# Altium PCB CW.PcbDoc (part 1 of 2)
Units mm, origin at the board's own origin, x right, y up, seen from the top; angles counter-clockwise.
Board outline 140 x 90 mm, 2 copper layers (Top Layer, Bottom Layer), stack 1.671 mm thick; 47 components, 38 nets, 137 pads, 5 vias.
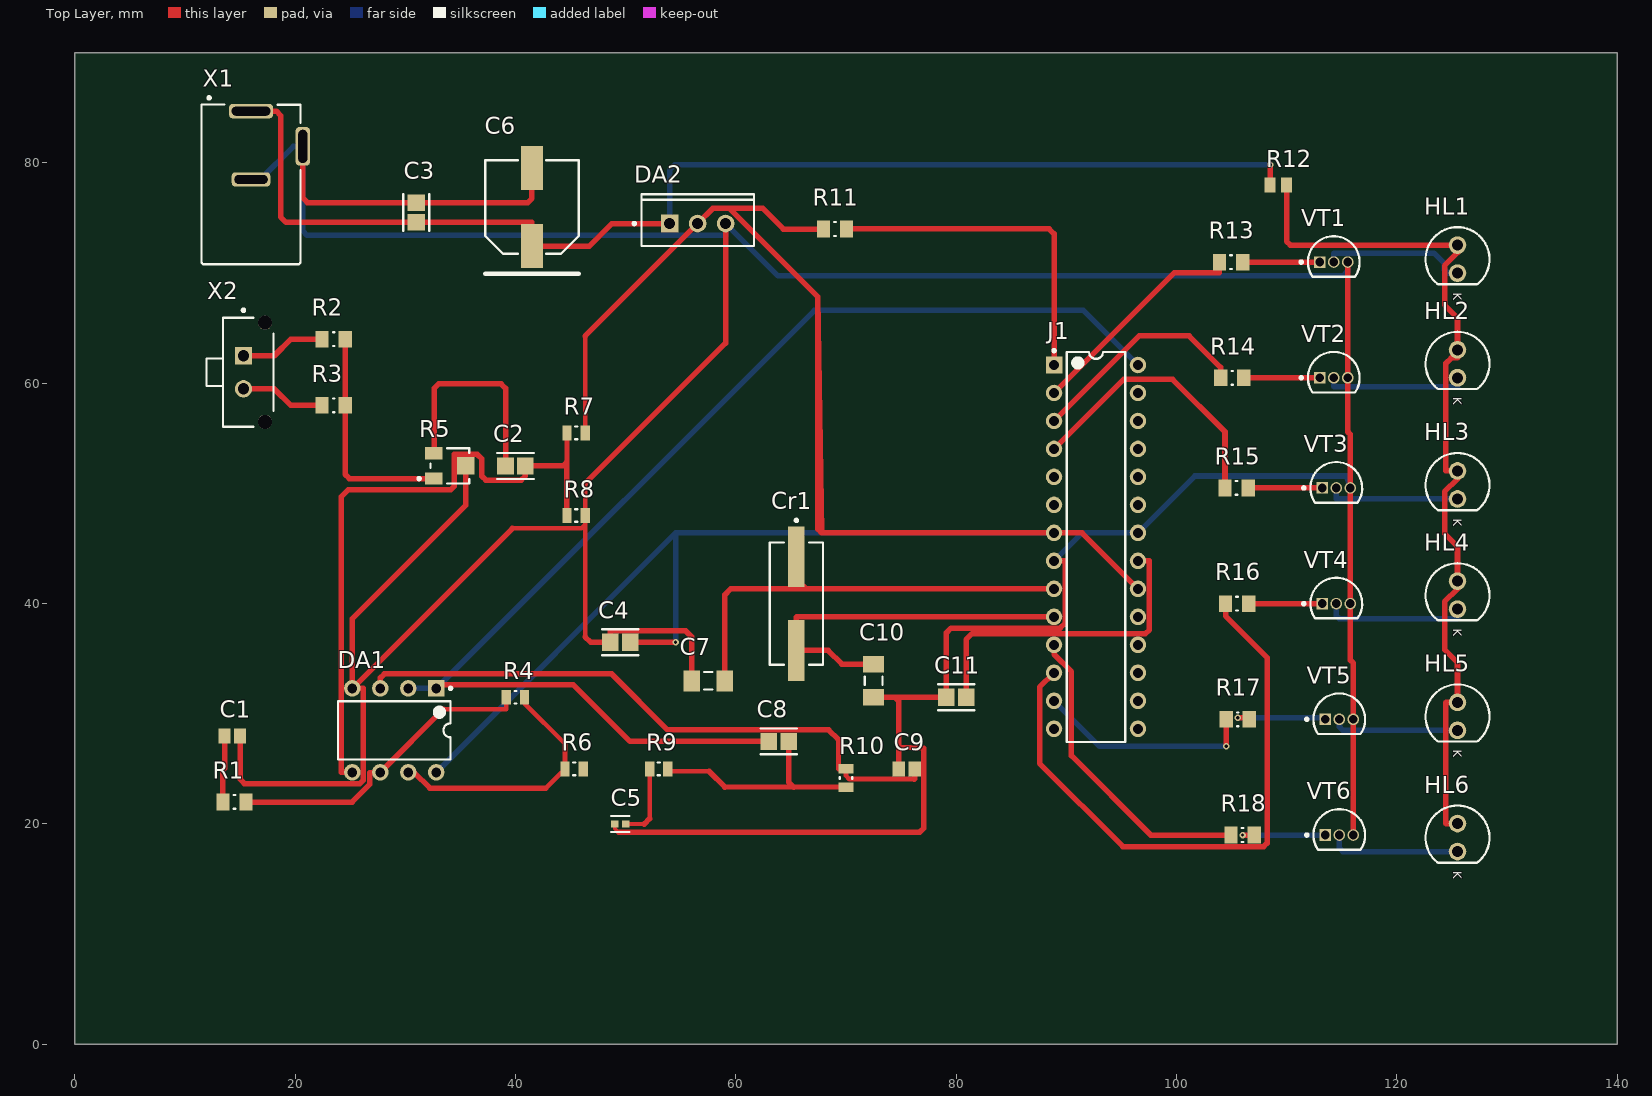
[diagram p0: Top Layer view]
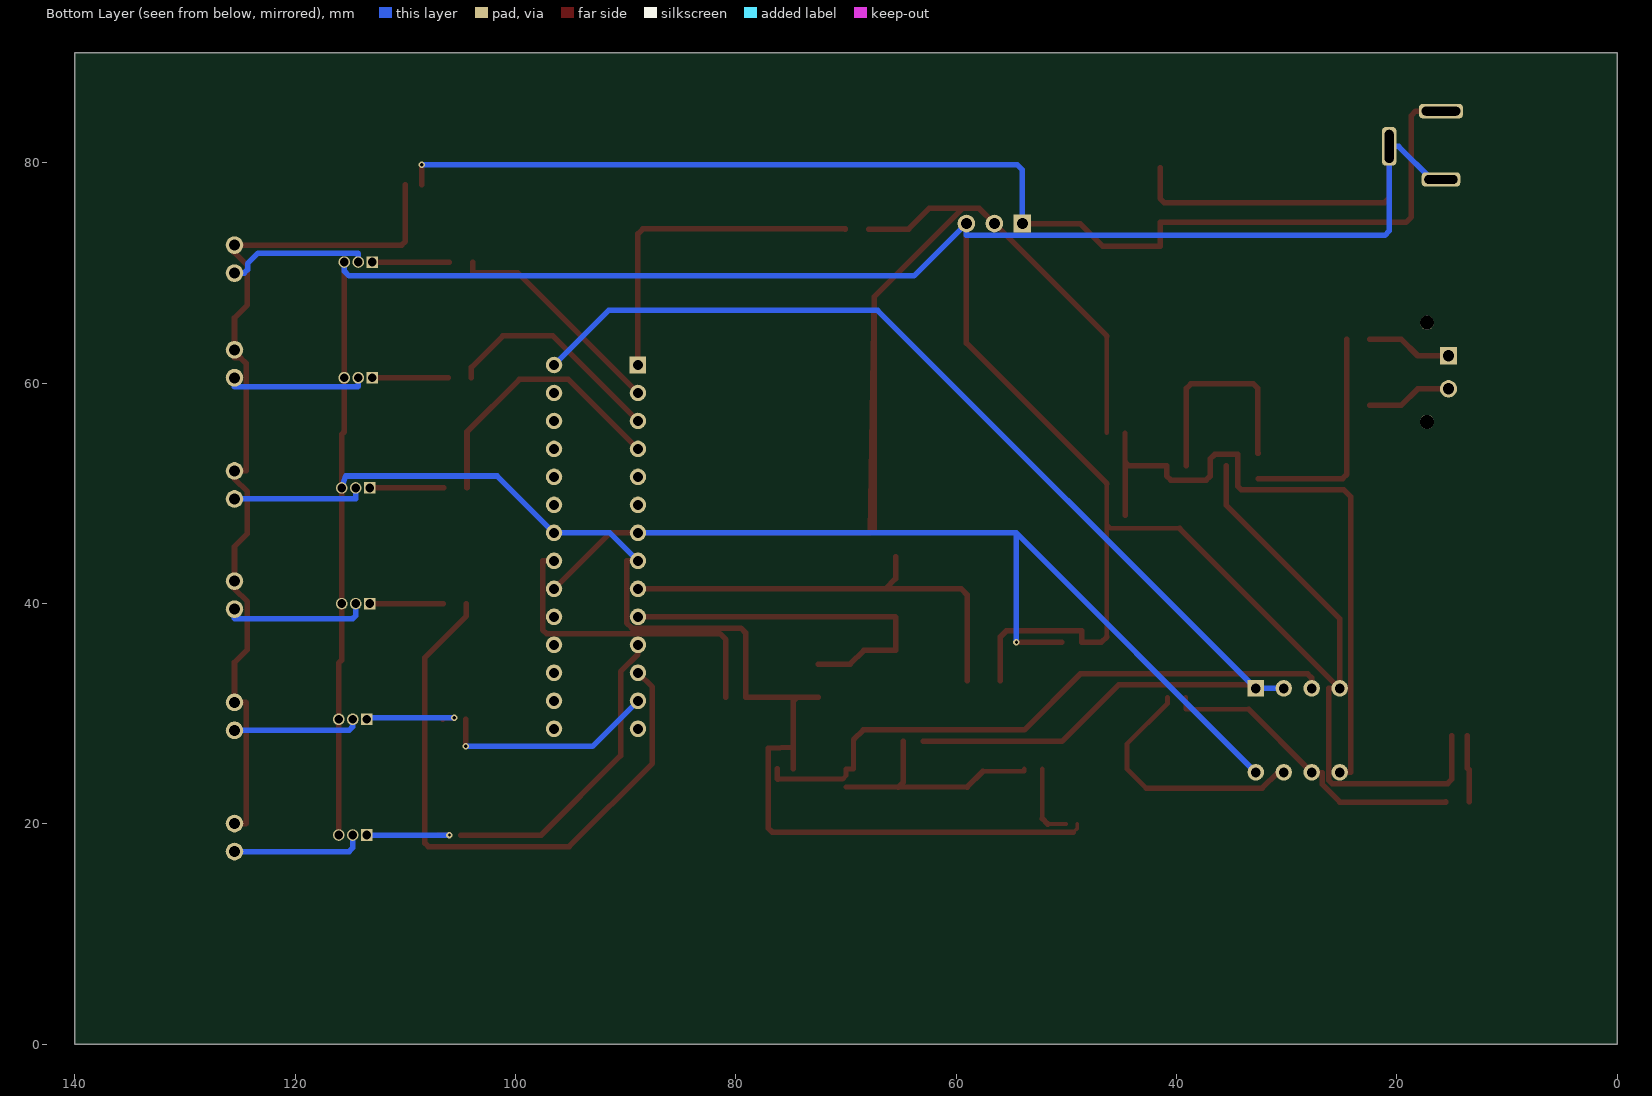
[diagram p1: Bottom Layer view, seen from below]
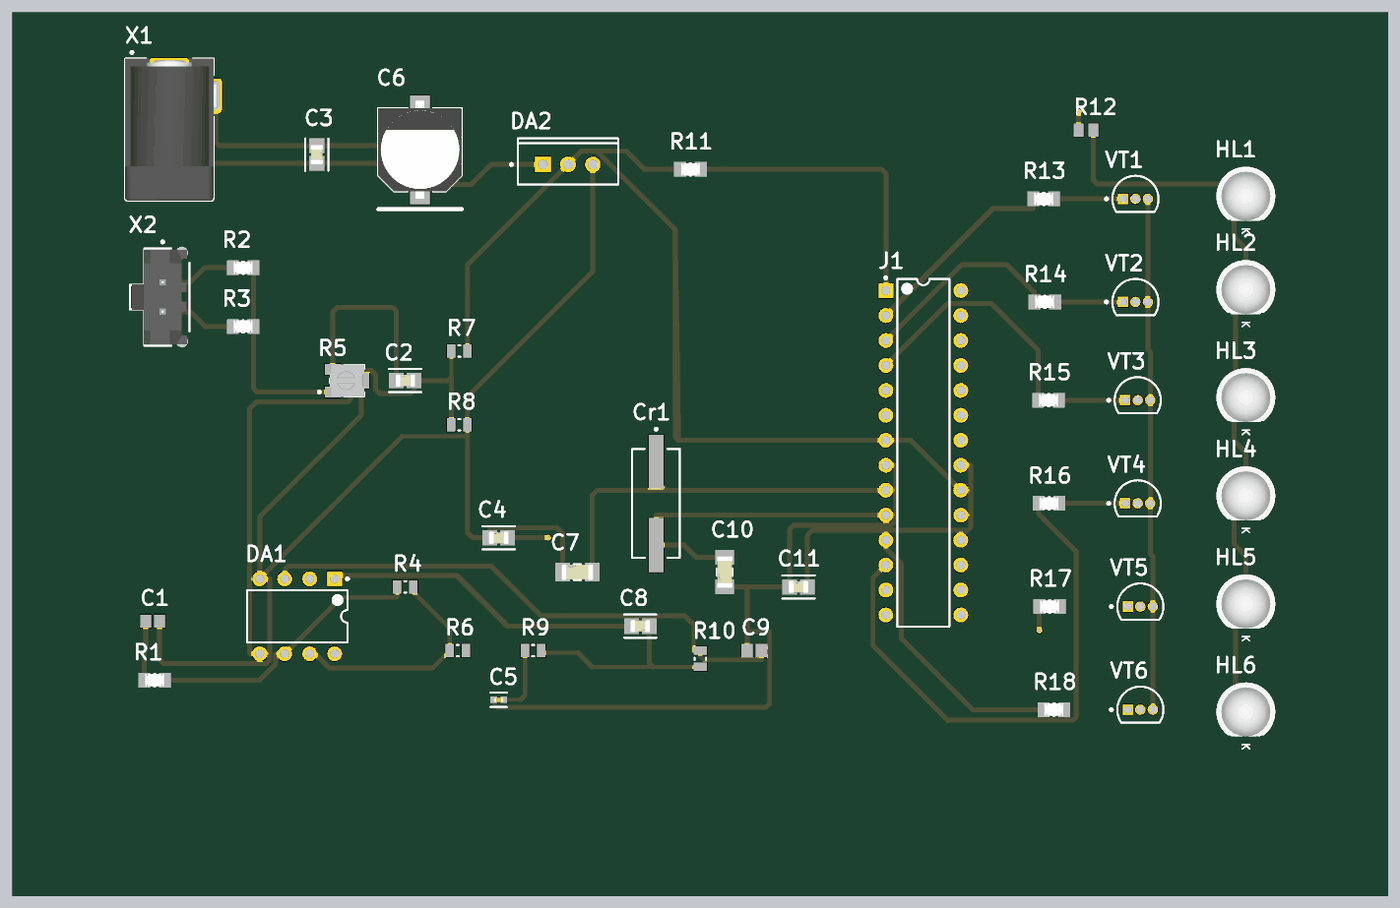
[diagram p2: 3D render of the assembled board from above, using the file's embedded part models]

## Layer stack, top to bottom
Top Solder: solder mask 0.0102, Solder Resist, Dk 3.5
Top Layer: signal copper 0.0356
Dielectric 1: dielectric 1.6, FR-4, Dk 4.8
Bottom Layer: signal copper 0.0356
Bottom Solder: solder mask 0.0102, Solder Resist, Dk 3.5

## Board outline
0,90 140,90 140,0 0,0

## Design rules (kind name [scope] priority, off if disabled: settings)
Clearance [All] p1: gap=0 ignorepadtopadclearanceinfootprint=FALSE
PolygonConnect [All] p1: connectstyle=Relief reliefconductorwidth=0.254 reliefentries=4 polygonreliefangle="90 Angle" airgapwidth=0.254
RoutingVias [All] p1: holewidth=0.3 width=0.6 viastyle="Through Hole" minholewidth=0.3 minwidth=0.6 maxholewidth=0.3 maxwidth=0.6
SMDNeckDown [All] p1: percent=50.000
SolderMaskExpansion [All] p1: expansion=0.102 istentingtop=FALSE
Width [All] p1: maxlimit=1 minlimit=0.3 preferedwidth=0.5
30 further rules are at their usual default settings.

## Components (designator, comment, footprint, x,y, rotation, side; value= is the part's Value field where it differs from the comment)
C1 "470nC" C470nF 14.3,28 r180 top
C2 "100nC" C100nF 40,52.5 r0 top
C3 "100nC" C100nF 31,75.5 r270 top
C4 "100nC" C100nF 49.5,36.5 r0 top
C5 "10nC" C10nF 49.502,20 r0 top
C6 "470uF" ELECTROLYTICCAP 41.5,76 r90 top
C7 "22pC" C22pF 57.5,33 r0 top
C8 "27nC" C27nF 63.901,27.5 r180 top
C9 "1.5nC" C1.5nF 75.5,25 r0 top
C10 "22pC" C22pF 72.5,33.001 r90 top
C11 "100nC" C100nF 80,31.5 r0 top
Cr1 "16MHz" Crystal 65.5,40 r270 top
DA1 "Amplifier (part B)" LM358 29,28.5 r270 top
DA2 "5V" LM7805 56.54,74.5 r90 top
HL1 "red led" LEDred 125.5,71.27 r270 top
HL2 "blue led" LEDblue 125.5,61.77 r270 top
HL3 "red led" LEDred 125.5,50.77 r270 top
HL4 "green led" LEDgreen 125.5,40.77 r270 top
HL5 "yellow led" LEDyellow 125.5,29.77 r270 top
HL6 "green led" LEDgreen 125.5,18.77 r270 top
J1 "1x2 Header" ATmega8 92.69,45.15 r0 top
R1 "10kR" R10kOhm 14.5,22 r0 top
R2 "1kR" R1kOhm 23.5,64 r0 top
R3 "1kR" R1kOhm 23.5,58 r0 top
R4 "100kR" R100kOhm 40,31.5 r0 top
R5 "10kR" Potentiometer 34.05,52.5 r0 top
R6 "2.4kR" R2.4kohm 45.325,25 r0 top
R7 "220kR" R220kOhm 45.5,55.5 r0 top
R8 "220kR" R220kOhm 45.5,48 r180 top
R9 "2.4kR" R2.4kohm 53,25 r0 top
R10 "2.4kR" R2.4kohm 70,24.175 r90 top
R11 "10kR" R10kOhm 69,74 r180 top
R12 "100R" R100Ohm 109.25,78 r0 top
R13 "1kR" R1kOhm 104.949,71 r0 top
R14 "1kR" R1kOhm 105.051,60.5 r0 top
R15 "1kR" R1kOhm 105.449,50.5 r0 top
R16 "1kR" R1kOhm 105.5,40 r0 top
R17 "1kR" R1kOhm 105.551,29.5 r0 top
R18 "1kR" R1kOhm 106,19 r0 top
VT1 "BC639" BC639 114.27,71 r0 top
VT2 "BC639" BC639 114.27,60.5 r0 top
VT3 "BC639" BC639 114.5,50.5 r0 top
VT4 "BC639" BC639 114.5,40 r0 top
VT5 "BC639" BC639 114.77,29.5 r0 top
VT6 "BC639" BC639 114.77,19 r0 top
X1 "+12V" PG_Connector 16,78.5 r270 top
X2 "ConnectorAudio" AudioConnector 15,61 r90 top

## Footprints (in the part's own frame and the unit in brackets; to place one, negate y for a bottom-side part, rotate by r counter-clockwise, add the part's x,y. Pads: shape width x height; smd on the part's side, far side on the other; paste and mask are expansions set on the pad)
ATmega8 [mm]
  rect 1.5x1.5 hole 0.9: 1(-3.81,16.51)
  round 1.5 hole 0.9: 2(-3.81,13.97) 3(-3.81,11.43) 4(-3.81,8.89) 5(-3.81,6.35) 6(-3.81,3.81) 7(-3.81,1.27) 8(-3.81,-1.27) 9(-3.81,-3.81) 10(-3.81,-6.35) 11(-3.81,-8.89) 12(-3.81,-11.43) 13(-3.81,-13.97) 14(-3.81,-16.51) 15(3.81,-16.51) 16(3.81,-13.97) 17(3.81,-11.43) 18(3.81,-8.89) 19(3.81,-6.35) 20(3.81,-3.81) 21(3.81,-1.27) 22(3.81,1.27) 23(3.81,3.81) 24(3.81,6.35) 25(3.81,8.89) 26(3.81,11.43) 27(3.81,13.97) 28(3.81,16.51)
  silkscreen extent -3.93,-17.7 2.65,17.93, body extent -3.6,-17.65 3.6,17.65, height 4.58
AudioConnector [mm]
  rect 1.57x1.57 hole 1.02 paste-1000 mask+0: 1(1.5,-0.315)
  round 1.57 hole 1.02 paste-1000 mask+0: 2(-1.5,-0.315)
  round 1.27 hole 1.27 unplated paste-1000 mask+0: ""(-4.5,-2.275) ""(4.5,-2.275)
  silkscreen extent -4.95,-3.04 5.75,3.03, body extent -5.24,-3.14 5.24,3.14, height 0.25
BC639 [mm]
  rect 1.05x1.05 hole 0.8: 1(-1.27,0)
  round 1.05 hole 0.8: 2(0,0) 3(1.27,0)
  silkscreen extent -3.07,-1.34 2.35,2.35, body extent -2.35,-1.33 2.36,2.36, height 7.87
C1.5nF [mm]
  rect 1.15x1.35 smd: 1(-0.725,0) 2(0.725,0)
  body extent -1.1,-0.72 1.1,0.72, height 0.94
C10nF [mm]
  rect 0.668x0.672 smd paste+0 mask+0: 1(-0.502,0) 2(0.502,0)
  silkscreen extent -0.84,-0.74 0.84,0.74, body extent -1.04,-0.54 1.04,0.54, height 0.25
C22pF [mm]
  rect 1.505x1.906 smd paste+0 mask+0: 1(-1.501,0) 2(1.501,0)
  silkscreen extent -0.37,-0.8 0.37,0.8, body extent -2.75,-1.45 2.75,1.45, height 0.25
C27nF [mm]
  rect 1.505x1.556 smd paste+0 mask+0: 1(-0.901,0) 2(0.901,0)
  silkscreen extent -1.65,-1.18 1.65,1.18, body extent -2.15,-1.28 2.15,1.28, height 0.25
C100nF [mm]
  rect 1.505x1.556 smd paste+0 mask+0: 1(-0.901,0) 2(0.901,0)
  silkscreen extent -1.65,-1.18 1.65,1.18, body extent -2.15,-1.28 2.15,1.28, height 0.25
C470nF [mm]
  rect 1.1x1.35 smd: 1(-0.7,0) 2(0.7,0)
  body extent -1.1,-0.72 1.1,0.72, height 1.4
Crystal [mm]
  rect 5.5x1.5 smd: 1(-4.25,0) 2(4.25,0)
  silkscreen extent -7.67,-2.41 5.55,2.42, body extent -5.59,-2.42 5.59,2.42, height 4.3
ELECTROLYTICCAP [mm]
  rect 4x2 smd: +(-3.55,0) -(3.55,0)
  silkscreen extent -6.05,-4.25 4.25,4.25, body extent -5,-4.25 5,4.25, height 10.5
LEDblue [mm]
  round 1.6 hole 1: 1(1.27,0) 2(-1.27,0)
  silkscreen extent -2.9,-2.9 2.29,2.9, body extent -2.9,-2.9 2.5,2.9, height 11.7
LEDgreen [mm]
  round 1.6 hole 1: 1(1.27,0) 2(-1.27,0)
  silkscreen extent -2.9,-2.9 2.29,2.9, body extent -2.9,-2.9 2.5,2.9, height 11.7
LEDred [mm]
  round 1.6 hole 1: 1(1.27,0) 2(-1.27,0)
  silkscreen extent -2.9,-2.9 2.29,2.9, body extent -2.9,-2.9 2.5,2.9, height 11.7
LEDyellow [mm]
  round 1.6 hole 1: 1(1.27,0) 2(-1.27,0)
  silkscreen extent -2.9,-2.9 2.29,2.9, body extent -2.9,-2.9 2.5,2.9, height 11.7
LM358 [mm]
  rect 1.5x1.5 hole 0.9: 1(-3.81,3.81)
  round 1.5 hole 0.9: 2(-3.81,1.27) 3(-3.81,-1.27) 4(-3.81,-3.81) 5(3.81,-3.81) 6(3.81,-1.27) 7(3.81,1.27) 8(3.81,3.81)
  silkscreen extent -3.93,-5.1 2.65,5.24, body extent -3.95,-5.07 3.95,5.07, height 5.08
LM7805 [mm]
  rect 1.6x1.6 hole 1: 1(0,2.54)
  round 1.6 hole 1: 2(0,0) 3(0,-2.54)
  silkscreen extent -2.04,-5.1 2.66,5.87, body extent -2.04,-5.1 2.66,5.1, height 18.95
PG_Connector [mm]
  rrect50% 1.3x4 hole 0.8 slot 3.5 at 90 deg: 1(-6.2,0)
  rrect50% 1.3x3.5 hole 0.8 slot 3 at 90 deg: 2(0,0)
  rrect50% 3.5x1.3 hole 0.8 slot 3 at 0 deg: 3(-3,4.7)
  silkscreen extent -7.52,-4.5 7.7,4.5, body extent -6.8,-4.5 7.7,4.9, height 10.8
Potentiometer [mm]
  rect 1.6x1.1 smd paste+0: 1(-1.45,-1.15) 3(-1.45,1.15)
  rect 1.6x1.6 smd paste+0: 2(1.45,0)
  silkscreen extent -2.92,-1.6 1.75,1.6, body extent -1.75,-1.65 1.75,1.65, height 2.11
R1kOhm [mil]
  rect 47.5x59.38 smd paste+0 mask+0: 1(-41.37,0) 2(41.37,0)
  silkscreen extent -3,-25 3,25, body extent -85,-49 85,49, height 10
R2.4kohm [mm]
  rect 0.85x1.35 smd: 1(-0.825,0) 2(0.825,0)
  silkscreen extent -0.1,-0.58 0.1,0.57, body extent -1.1,-0.72 1.1,0.72, height 0.5
R10kOhm [mil]
  rect 47.5x59.38 smd paste+0 mask+0: 1(-41.37,0) 2(41.37,0)
  silkscreen extent -3,-25 3,25, body extent -85,-49 85,49, height 10
R100kOhm [mm]
  rect 0.85x1.35 smd: 1(-0.825,0) 2(0.825,0)
  silkscreen extent -0.1,-0.58 0.1,0.58, body extent -1.1,-0.72 1.1,0.72, height 0.5
R100Ohm [mm]
  rect 1x1.35 smd: 1(-0.75,0) 2(0.75,0)
  body extent -1.1,-0.72 1.1,0.72, height 0.6
R220kOhm [mm]
  rect 0.85x1.35 smd: 1(-0.825,0) 2(0.825,0)
  silkscreen extent -0.1,-0.58 0.1,0.58, body extent -1.1,-0.72 1.1,0.72, height 0.5

## Part data
C1: library part C0805YC474KAT2A, "CAP, X7R, 470NF, 16V, 0805, FULL REEL", Capacitance=470nF, Case Code (Imperial)=0805, Case Code (Metric)=2012, Dielectric=X7R, Insulation Resistance=100GR, Manufacturer="Kyocera AVX", Manufacturer Part Number=0805YC474KAT2A, Max Operating Temperature=125°C, Min Operating Temperature=-55°C, Package Quantity=1, Supplier Part Number 1=478-1403-1-ND, Tolerance=10%, Voltage=16V, Case/Package=0805, Category="Ceramic Capacitors", ComponentLink1Description=https://datasheet.ciiva.com/19476/2011221-19476183.pdf?src-supplier=Jameco, ComponentLink1URL=https://datasheet.ciiva.com/19476/2011221-19476183.pdf?src-supplier=Jameco, ComponentLink2Description=https://datasheet.ciiva.com/11786/0900766b80ed4be2-11786321.pdf?src-supplier=RSComponents, ComponentLink2URL=https://datasheet.ciiva.com/11786/0900766b80ed4be2-11786321.pdf?src-supplier=RSComponents, ComponentLink3Description=https://datasheet.ciiva.com/2988/cx7r-2988058.pdf?src-supplier=Avnet, ComponentLink3URL=https://datasheet.ciiva.com/2988/cx7r-2988058.pdf?src-supplier=Avnet, ComponentLink4Description=https://datasheet.ciiva.com/16326/cx7r-16326277.pdf?src-supplier=Future+Electronics, ComponentLink4URL=https://datasheet.ciiva.com/16326/cx7r-16326277.pdf?src-supplier=Future+Electronics, ComponentLink5Description=https://datasheet.ciiva.com/16623/cx7r-16623416.pdf?src-supplier=Avnet+Europe, ComponentLink5URL=https://datasheet.ciiva.com/16623/cx7r-16623416.pdf?src-supplier=Avnet+Europe, ComponentLink6Description=https://datasheet.ciiva.com/16544/cx7r-16544108.pdf?src-supplier=Avnet+Asia, ComponentLink6URL=https://datasheet.ciiva.com/16544/cx7r-16544108.pdf?src-supplier=Avnet+Asia, ComponentLink7Description=https://datasheet.ciiva.com/7812/cx7r-7812207.pdf?src-supplier=Element14, ComponentLink7URL=https://datasheet.ciiva.com/7812/cx7r-7812207.pdf?src-supplier=Element14, ComponentLink8Description=https://datasheet.ciiva.com/152/cx7r-152109.pdf?src-supplier=Digi-Key, ComponentLink8URL=https://datasheet.ciiva.com/152/cx7r-152109.pdf?src-supplier=Digi-Key, ComponentLink9Description=https://datasheet.ciiva.com/152/cx7r-152108.pdf?src-supplier=Digi-Key, ComponentLink9URL=https://datasheet.ciiva.com/152/cx7r-152108.pdf?src-supplier=Digi-Key, ComponentLink10Description=https://datasheet.ciiva.com/152/cx7r-152110.pdf?src-supplier=Digi-Key, ComponentLink10URL=https://datasheet.ciiva.com/152/cx7r-152110.pdf?src-supplier=Digi-Key, ComponentLink11Description=https://datasheet.ciiva.com/5416/cx7r-218113-5416693.pdf?src-supplier=Mouser, ComponentLink11URL=https://datasheet.ciiva.com/5416/cx7r-218113-5416693.pdf?src-supplier=Mouser, ComponentLink12Description=https://datasheet.ciiva.com/14590/70001075-14590213.pdf?src-supplier=Allied+Electronics, ComponentLink12URL=https://datasheet.ciiva.com/14590/70001075-14590213.pdf?src-supplier=Allied+Electronics, ComponentLink13Description=https://datasheet.ciiva.com/14602/70001075-14602165.pdf?src-supplier=Allied+Electronics, ComponentLink13URL=https://datasheet.ciiva.com/14602/70001075-14602165.pdf?src-supplier=Allied+Electronics, Construction=Flat, Contact Plating=Tin,Matte, Depth=1.25mm, Dissipation Factor=3.5%, Height=1.4mm, Lead Free="Lead Free", Length=2.01mm, Mount="Surface Mount,PCB", Number of Pins=2, Packaging="Tape and Reel", Pricing 1="1=0,27000, 10=0,18100, 50=0,10840, 100=0,09160, 500=0,06268, 1000=0,05544 (USD)", Radiation Hardening=No, REACH SVHC="No SVHC", RoHS=Yes, RoHS Compliant=Yes, Series=-, Size=1.4mm, Stock 1=8545, Supplier 1=Digi-Key, Termination=SMD/SMT, Thickness=0.055inch, Voltage Rating=16V, Voltage Rating (DC)=16V, Width=1.25mm
C2 C3 C4 C11: library part C0805C104M4VACTU, "CAP CER 0.1UF 16V 20% Y5V 0805", Capacitance=100nF, Case Code (Imperial)=0805, Case Code (Metric)=2012, Dielectric=Y5V, Dielectric Material=Ceramic, Manufacturer=KEMET, Max Operating Temperature=85°C, Min Operating Temperature=-30°C, Package Quantity=1, Supplier Part Number 1=399-9156-1-ND, Tolerance=20%, Voltage Rating=16V, Case/Package=0805, Category="Ceramic Capacitors", ComponentLink1Description=http://www.mouser.com/ds/2/212/KEM_C1005_Y5V_SMD-1101305.pdf?src-supplier=Mouser, ComponentLink1URL=http://www.mouser.com/ds/2/212/KEM_C1005_Y5V_SMD-1101305.pdf?src-supplier=Mouser, ComponentLink2Description=https://api.kemet.com/component-edge/download/datasheet/C0805C104M4VACTU.pdf?src-supplier=Digi-Key, ComponentLink2URL=https://api.kemet.com/component-edge/download/datasheet/C0805C104M4VACTU.pdf?src-supplier=Digi-Key, Depth=1.25mm, Dissipation Factor=7%, Height=0.9mm, Lead Free="Lead Free", Lead Pitch=0.75mm, Length=0.079inch, Manufacturer Part Number=C0805C104M4VACTU, Mount="Surface Mount", Packaging="Tape and Reel", Pricing 1="1=0,13000, 10=0,09600, 50=0,05440, 100=0,04500, 500=0,03156, 1000=0,02613 (USD)", RoHS=Yes, RoHS Compliant=Yes, Series=C, Stock 1=9052, Supplier 1=Digi-Key, Termination=SMD/SMT, Thickness=0.035inch, Voltage Rating (DC)=16V, Width=0.049inch
C5: library part CC0402KRX7R7BB103, "CAP CER 10000PF 16V X7R 0402", Capacitance=10nF, Case Code (Imperial)=0402, Case Code (Metric)=1005, Dielectric=X7R, Insulation Resistance=10GR, Manufacturer=Yageo, Max Operating Temperature=125°C, Min Operating Temperature=-55°C, Package Quantity=1, Supplier Part Number 1=9410754, Tolerance=10%, Voltage=16V, Case/Package=0402, Category="Ceramic Capacitors", ComponentLink1Description=https://datasheet.ciiva.com/143/upy-gphc-x7r-6-3v-to-50v-8-143952.pdf?src-supplier=Digi-Key, ComponentLink1URL=https://datasheet.ciiva.com/143/upy-gphc-x7r-6-3v-to-50v-8-143952.pdf?src-supplier=Digi-Key, ComponentLink2Description=https://datasheet.ciiva.com/143/mlccorderingcode-143950.pdf?src-supplier=Digi-Key, ComponentLink2URL=https://datasheet.ciiva.com/143/mlccorderingcode-143950.pdf?src-supplier=Digi-Key, ComponentLink3Description=https://datasheet.ciiva.com/143/mlccorderingcode-143951.pdf?src-supplier=Digi-Key, ComponentLink3URL=https://datasheet.ciiva.com/143/mlccorderingcode-143951.pdf?src-supplier=Digi-Key, ComponentLink4Description=https://datasheet.ciiva.com/16625/upy-gphc-x7r-6-3v-to-50v-8-16625510.pdf?src-supplier=Avnet+Europe, ComponentLink4URL=https://datasheet.ciiva.com/16625/upy-gphc-x7r-6-3v-to-50v-8-16625510.pdf?src-supplier=Avnet+Europe, ComponentLink5Description=https://datasheet.ciiva.com/8033/70765-8033655.pdf?src-supplier=Element14, ComponentLink5URL=https://datasheet.ciiva.com/8033/70765-8033655.pdf?src-supplier=Element14, ComponentLink6Description=https://datasheet.ciiva.com/8033/1489800-8033658.pdf?src-supplier=Element14, ComponentLink6URL=https://datasheet.ciiva.com/8033/1489800-8033658.pdf?src-supplier=Element14, ComponentLink7Description=https://datasheet.ciiva.com/28450/1489800-28450330.pdf?src-supplier=Element14, ComponentLink7URL=https://datasheet.ciiva.com/28450/1489800-28450330.pdf?src-supplier=Element14, ComponentLink8Description=https://datasheet.ciiva.com/8033/1489800-8033659.pdf?src-supplier=Element14, ComponentLink8URL=https://datasheet.ciiva.com/8033/1489800-8033659.pdf?src-supplier=Element14, ComponentLink9Description=https://datasheet.ciiva.com/7978/1489800-7978109.pdf?src-supplier=Element14, ComponentLink9URL=https://datasheet.ciiva.com/7978/1489800-7978109.pdf?src-supplier=Element14, ComponentLink10Description=https://datasheet.ciiva.com/5425/upy-gp-np0-16v-to-50v-8-3714-5425438.pdf?src-supplier=Mouser, ComponentLink10URL=https://datasheet.ciiva.com/5425/upy-gp-np0-16v-to-50v-8-3714-5425438.pdf?src-supplier=Mouser, Depth=0.5mm, Dissipation Factor=3.5%, Halogen Free="Halogen Free", Height=0.5mm, Lead Free="Lead Free", Length=1mm, Manufacturer Part Number=CC0402KRX7R7BB103, Mount="Surface Mount", Number of Pins=2, Packaging="Tape and Reel", Pricing 1="1=0,00300, 500=0,00220, 1500=0,00210, 2500=0,00200, 5000=0,00200 (USD)", Radiation Hardening=No, REACH SVHC="No SVHC", RoHS=Yes, RoHS Compliant=Yes, Series=CC, Stock 1=39464018, Supplier 1="Future Electronics", Termination=SMD/SMT, Thickness=0.022inch, Voltage Rating=16V, Voltage Rating (DC)=16V, Width=0.02inch
C6: library part EEEFK1C471P, "PANASONIC - EEEFK1C471P - SMD Aluminum Electrolytic Capacitor, Radial Can - SMD, 470 µF, 16 V, FK Series, 2000 hours @ 105°C", Case/Package=Radial, Dielectric Material=Aluminium, ESR (Equivalent Series Resistance)=160mR, Leakage Current=3uA, Manufacturer=Panasonic, Max Operating Temperature=105°C, Min Operating Temperature=-55°C, Package Quantity=1, Ripple Current=600mA, Supplier Part Number 1=5370477P, Tolerance=20%, Voltage=16V, Capacitance=470uF, Category="Aluminum Electrolytic Capacitors", ComponentLink1Description=https://datasheet.ciiva.com/11777/0900766b80e4e8b0-11777355.pdf?src-supplier=RSComponents, ComponentLink1URL=https://datasheet.ciiva.com/11777/0900766b80e4e8b0-11777355.pdf?src-supplier=RSComponents, ComponentLink2Description=https://datasheet.ciiva.com/29313/443466-da-01-en-smd-elko-vfk-f-470-uf-16v-29313494.pdf?src-supplier=Conrad, ComponentLink2URL=https://datasheet.ciiva.com/29313/443466-da-01-en-smd-elko-vfk-f-470-uf-16v-29313494.pdf?src-supplier=Conrad, ComponentLink3Description=https://datasheet.ciiva.com/15165/getdatasheetpartid-85020-15165862.pdf?src-supplier=Verical, ComponentLink3URL=https://datasheet.ciiva.com/15165/getdatasheetpartid-85020-15165862.pdf?src-supplier=Verical, ComponentLink4Description=https://datasheet.ciiva.com/2983/aba0000ce120-2983946.pdf?src-supplier=Avnet, ComponentLink4URL=https://datasheet.ciiva.com/2983/aba0000ce120-2983946.pdf?src-supplier=Avnet, ComponentLink5Description=https://datasheet.ciiva.com/14592/70258115-14592955.pdf?src-supplier=Allied+Electronics, ComponentLink5URL=https://datasheet.ciiva.com/14592/70258115-14592955.pdf?src-supplier=Allied+Electronics, ComponentLink6Description=https://datasheet.ciiva.com/6121/1676921-6121148.pdf?src-supplier=Farnell, ComponentLink6URL=https://datasheet.ciiva.com/6121/1676921-6121148.pdf?src-supplier=Farnell, ComponentLink7Description=https://datasheet.ciiva.com/14595/70258115-14595868.pdf?src-supplier=Allied+Electronics, ComponentLink7URL=https://datasheet.ciiva.com/14595/70258115-14595868.pdf?src-supplier=Allied+Electronics, ComponentLink8Description=https://datasheet.ciiva.com/30213/aba0000ce120-30213244.pdf?src-supplier=Onlinecomponents.com, ComponentLink8URL=https://datasheet.ciiva.com/30213/aba0000ce120-30213244.pdf?src-supplier=Onlinecomponents.com, ComponentLink9Description=https://datasheet.ciiva.com/46376/1676921-46376492.pdf?src-supplier=Element14, ComponentLink9URL=https://datasheet.ciiva.com/46376/1676921-46376492.pdf?src-supplier=Element14, ComponentLink10Description=https://datasheet.ciiva.com/2985/aba0000ce120-2985405.pdf?src-supplier=Avnet, ComponentLink10URL=https://datasheet.ciiva.com/2985/aba0000ce120-2985405.pdf?src-supplier=Avnet, ComponentLink11Description=https://datasheet.ciiva.com/25899/aba0000ce120-25899342.pdf?src-supplier=Avnet+Europe, ComponentLink11URL=https://datasheet.ciiva.com/25899/aba0000ce120-25899342.pdf?src-supplier=Avnet+Europe, Construction=Cylindrical, Contact Plating=Tin, Diameter=8mm, Height=10.2mm, Height - Seated (Max)=0.402inch, Impedance=160mR, Lead Free="Lead Free", Length=10.2mm, Life (Hours)=2000Hour, Manufacturer Part Number=EEEFK1C471P, Material=Aluminium, Mount="Surface Mount,PCB", Number of Pins=2, Packaging="Tape and Reel", Pricing 1="50=0,38600, 150=0,32900 (USD)", Radiation Hardening=No, REACH SVHC="No SVHC", Ripple Current (AC)=600mA, RoHS=Yes, RoHS Compliant=Yes, Series=FK, Stock 1=30580, Supplier 1=RSComponents, Termination=SMD/SMT, Voltage Rating=16V, Voltage Rating (DC)=16V, Width=10mm
C7 C10: library part C1206C220J5GACTU, "1206 22pF Ceramic Multilayer Capacitor; 50VDC; 125degC; C0G Dielec; +/-5% SMD", Capacitance=22pF, Case Code (Imperial)=1206, Case Code (Metric)=3216, Dielectric=C0G, Dielectric Material=Ceramic, Manufacturer=KEMET, Max Operating Temperature=125°C, Min Operating Temperature=-55°C, Package Quantity=1, Supplier Part Number 1=399-1197-1-ND, Temperature Coefficient=30ppm/°C, Tolerance=5%, Voltage=50V, Case/Package=1206, Category="Ceramic Capacitors", ComponentLink1Description=https://datasheet.ciiva.com/6177/1776099-6177664.pdf?src-supplier=Farnell, ComponentLink1URL=https://datasheet.ciiva.com/6177/1776099-6177664.pdf?src-supplier=Farnell, ComponentLink2Description=https://datasheet.ciiva.com/145/docfinderpartnumber-c1206c220j5gactu-145591.pdf?src-supplier=Digi-Key, ComponentLink2URL=https://datasheet.ciiva.com/145/docfinderpartnumber-c1206c220j5gactu-145591.pdf?src-supplier=Digi-Key, ComponentLink3Description=https://datasheet.ciiva.com/7729/1776099-7729850.pdf?src-supplier=Element14, ComponentLink3URL=https://datasheet.ciiva.com/7729/1776099-7729850.pdf?src-supplier=Element14, ComponentLink4Description=https://datasheet.ciiva.com/28668/1789732-28668845.pdf?src-supplier=Element14, ComponentLink4URL=https://datasheet.ciiva.com/28668/1789732-28668845.pdf?src-supplier=Element14, ComponentLink5Description=https://datasheet.ciiva.com/14593/70095383-14593639.pdf?src-supplier=Allied+Electronics, ComponentLink5URL=https://datasheet.ciiva.com/14593/70095383-14593639.pdf?src-supplier=Allied+Electronics, ComponentLink6Description=https://datasheet.ciiva.com/14608/70095383-14608661.pdf?src-supplier=Allied+Electronics, ComponentLink6URL=https://datasheet.ciiva.com/14608/70095383-14608661.pdf?src-supplier=Allied+Electronics, ComponentLink7Description=https://datasheet.ciiva.com/2988/kem-c1003-c0g-smd-2988752.pdf?src-supplier=Avnet, ComponentLink7URL=https://datasheet.ciiva.com/2988/kem-c1003-c0g-smd-2988752.pdf?src-supplier=Avnet, ComponentLink8Description=https://datasheet.ciiva.com/2988/kem-c1003-c0g-smd-2988751.pdf?src-supplier=Avnet, ComponentLink8URL=https://datasheet.ciiva.com/2988/kem-c1003-c0g-smd-2988751.pdf?src-supplier=Avnet, ComponentLink9Description=https://datasheet.ciiva.com/18102/getdatasheetpartid-68144-18102364.pdf?src-supplier=Verical, ComponentLink9URL=https://datasheet.ciiva.com/18102/getdatasheetpartid-68144-18102364.pdf?src-supplier=Verical, ComponentLink10Description=https://datasheet.ciiva.com/11649/kem-c1003-c0g-smd-11649994.pdf?src-supplier=Avnet, ComponentLink10URL=https://datasheet.ciiva.com/11649/kem-c1003-c0g-smd-11649994.pdf?src-supplier=Avnet, Construction=Flat, Contact Material=Tin, Depth=1.6mm, Dissipation Factor=0.1%, Height=0.78mm, Lead Free="Lead Free", Length=3.2mm, Manufacturer Part Number=C1206C220J5GACTU, Mount="Surface Mount,PCB", Packaging="Tape and Reel", Pricing 1="1=0,25000, 10=0,16700, 50=0,10040, 100=0,08480, 500=0,05800, 1000=0,05131 (USD)", Radiation Hardening=No, REACH SVHC="No SVHC", RoHS=Yes, RoHS Compliant=Yes, Series=C, Stock 1=60049, Supplier 1=Digi-Key, Termination=SMD/SMT, Thickness=0.035inch, Voltage Rating=50V, Voltage Rating (DC)=50V, Width=1.6mm
C8: library part C0805C273K5RACTU, "CAP CER 0.027UF 50V X7R 0805", Capacitance=27nF, Case Code (Imperial)=0805, Case Code (Metric)=2012, Dielectric=X7R, Dielectric Material=Ceramic, Manufacturer=KEMET, Max Operating Temperature=125°C, Min Operating Temperature=-55°C, Package Quantity=1, Supplier Part Number 1=399-1164-1-ND, Tolerance=10%, Voltage=50V, Case/Package=0805, Category="Ceramic Capacitors", ComponentLink1Description=https://datasheet.ciiva.com/14593/70095383-14593543.pdf?src-supplier=Allied+Electronics, ComponentLink1URL=https://datasheet.ciiva.com/14593/70095383-14593543.pdf?src-supplier=Allied+Electronics, ComponentLink2Description=https://datasheet.ciiva.com/14592/70095383-14592123.pdf?src-supplier=Allied+Electronics, ComponentLink2URL=https://datasheet.ciiva.com/14592/70095383-14592123.pdf?src-supplier=Allied+Electronics, ComponentLink3Description=https://datasheet.ciiva.com/7842/1918693-7842589.pdf?src-supplier=Element14, ComponentLink3URL=https://datasheet.ciiva.com/7842/1918693-7842589.pdf?src-supplier=Element14, ComponentLink4Description=https://datasheet.ciiva.com/7842/kem-c1002-x7r-smd-7842590.pdf?src-supplier=Element14, ComponentLink4URL=https://datasheet.ciiva.com/7842/kem-c1002-x7r-smd-7842590.pdf?src-supplier=Element14, Construction=Flat, Depth=1.25mm, Dissipation Factor=2.5%, Height=0.78mm, Lead Pitch=0.75mm, Length=2mm, Manufacturer Part Number=C0805C273K5RACTU, Mount="Surface Mount,PCB", Number of Pins=2, Packaging="Tape and Reel", Pricing 1="1=0,11000, 10=0,08100, 50=0,04580, 100=0,03800, 500=0,02666, 1000=0,02207 (USD)", Radiation Hardening=No, REACH SVHC="No SVHC", RoHS=Yes, RoHS Compliant=Yes, Series=C, Stock 1=100815, Supplier 1=Digi-Key, Termination=SMD/SMT, Thickness=0.035inch, Voltage Rating=50V, Voltage Rating (DC)=50V, Width=0.049inch
C9: library part C08051C152KAT2A, "0805 1.5nF Ceramic Multilayer Capacitor,  100 VDC,  +125degC,  X7R Dielec,  +/-10%", Capacitance=1.5nF, Case Code (Imperial)=0805, Case Code (Metric)=2012, Dielectric=X7R, Dielectric Material=Ceramic, Insulation Resistance=100GR, Manufacturer="Kyocera AVX", Manufacturer Part Number=08051C152KAT2A, Max Operating Temperature=125°C, Min Operating Temperature=-55°C, Package Quantity=1, Supplier Part Number 1=478-1353-1-ND, Tolerance=10%, Voltage=100V, Case/Package=0805, Category="Ceramic Capacitors", ComponentLink1Description=https://datasheet.ciiva.com/150/cx7r-150629.pdf?src-supplier=Digi-Key, ComponentLink1URL=https://datasheet.ciiva.com/150/cx7r-150629.pdf?src-supplier=Digi-Key, ComponentLink2Description=https://datasheet.ciiva.com/150/cx7r-150630.pdf?src-supplier=Digi-Key, ComponentLink2URL=https://datasheet.ciiva.com/150/cx7r-150630.pdf?src-supplier=Digi-Key, ComponentLink3Description=https://datasheet.ciiva.com/150/cx7r-150631.pdf?src-supplier=Digi-Key, ComponentLink3URL=https://datasheet.ciiva.com/150/cx7r-150631.pdf?src-supplier=Digi-Key, ComponentLink4Description=https://datasheet.ciiva.com/7811/cx7r-7811928.pdf?src-supplier=Element14, ComponentLink4URL=https://datasheet.ciiva.com/7811/cx7r-7811928.pdf?src-supplier=Element14, ComponentLink5Description=https://datasheet.ciiva.com/7811/cx7r-7811929.pdf?src-supplier=Element14, ComponentLink5URL=https://datasheet.ciiva.com/7811/cx7r-7811929.pdf?src-supplier=Element14, ComponentLink6Description=https://datasheet.ciiva.com/7811/cx7r-7811930.pdf?src-supplier=Element14, ComponentLink6URL=https://datasheet.ciiva.com/7811/cx7r-7811930.pdf?src-supplier=Element14, Contact Plating=Tin,Matte, Depth=1.25mm, Dissipation Factor=2.5%, Height=0.94mm, Lead Free="Lead Free", Length=2.01mm, Mount="Surface Mount,PCB", Number of Pins=2, Packaging="Tape and Reel", Pricing 1="1=0,19000, 10=0,13200, 50=0,07480, 100=0,06200, 500=0,04350, 1000=0,03601 (USD)", Radiation Hardening=No, REACH SVHC="No SVHC", RoHS=Yes, RoHS Compliant=Yes, Stock 1=214, Supplier 1=Digi-Key, Termination=SMD/SMT, Thickness=0.037inch, Voltage Rating=100V, Voltage Rating (DC)=100V, Width=0.049inch
Cr1: library part ATS16ASM-1, "CRYSTAL 16.0MHZ 20PF SMD", ESR (Equivalent Series Resistance)=40R, Frequency Stability=50ppm, Frequency Tolerance=30ppm, Load Capacitance=20pF, Manufacturer=CTS, Max Operating Temperature=70°C, Min Operating Temperature=-20°C, Package Quantity=1000, Supplier Part Number 1=CTX1440CT-ND, Category=Crystals, ComponentLink1Description=https://datasheet.ciiva.com/861/008-0309-0-861005.pdf?src-supplier=Digi-Key, ComponentLink1URL=https://datasheet.ciiva.com/861/008-0309-0-861005.pdf?src-supplier=Digi-Key, Frequency=16MHz, Height=0.169inch, Length=0.437inch, Manufacturer Part Number=ATS16ASM-1, Mount="Surface Mount", Number of Pins=2, Packaging="Tape and Reel", Pricing 1="1=0,37000, 10=0,30500, 50=0,27440, 100=0,24400, 500=0,23180 (USD)", RoHS=Yes, RoHS Compliant=Yes, Series=ATS-SM, Series Resistance=40R, Stock 1=949, Supplier 1=Digi-Key, Termination=SMD/SMT, Tolerance=30ppm, Width=0.19inch
DA1: library part "LM358N/NOPB (1)", "TEXAS INSTRUMENTS   LM358N/NOPB..   OP AMP, 1MHZ, 0.1V/S, 7MV, DIP8", Case/Package=PDIP, Input Bias Current=250nA, Input Offset Voltage (Vos)=7mV, Manufacturer="TI National Semiconductor", Manufacturer Part Number=LM358N/NOPB, Max Dual Supply Voltage=16V, Max Operating Temperature=70°C, Max Power Dissipation=830mW, Max Supply Current=1.2mA, Max Supply Voltage=32V, Min Dual Supply Voltage=1.5V, Min Operating Temperature=0°C, Min Supply Voltage=3V, Nominal Supply Current=500uA, Operating Supply Current=1mA, Output Current=30mA, Output Current per Channel=40mA, Package Quantity=40, Power Supply Rejection Ratio (PSRR)=65dB, Supplier Part Number 1=LM358NNS/NOPB-ND, Voltage Gain=100dB, Bandwidth=1MHz, Category="Amplifiers - Op Amps, Buffer, Instrumentation", Common Mode Rejection Ratio=65dB, Gain Bandwidth Product=1MHz, Height=3.3mm, Lead Free="Lead Free", Length=9.27mm, Mount="Through Hole", Number of Amplifiers=2, Number of Channels=2, Number of Circuits=2, Number of Elements=2, Number of Pins=8, Operating Supply Voltage=16V, Packaging=Rail/Tube, Power Dissipation=830mW, Pricing 1="1=1,00000, 10=0,89100, 25=0,84600, 100=0,69480, 250=0,64952, 500=0,57400, 1000=0,47595 (USD)", Radiation Hardening=No, REACH SVHC="No SVHC", RoHS=Yes, Slew Rate=0.1V/µs, Stock 1=24976, Supplier 1=Digi-Key, Unity Gain Bandwidth Product=1MHz, Weight=0.01lb, Width=6.35mm
DA2: library part LM7805CT/NOPB, "Series 3-Terminal Positive Regulators", Case/Package=TO-220, Dropout Voltage=2V, Manufacturer="Texas Instruments", Max Input Voltage=35V, Max Operating Temperature=125°C, Max Output Current=1A, Min Input Voltage=10V, Min Operating Temperature=0°C, Output Voltage Accuracy=2%, Package Quantity=45, Quiescent Current=8mA, Supplier Part Number 1=296-47192-ND, Accuracy=2%, Category="Voltage Regulators - Linear", ComponentLink1Description=https://datasheet.ciiva.com/45987/902071-45987836.pdf?src-supplier=Jameco, ComponentLink1URL=https://datasheet.ciiva.com/45987/902071-45987836.pdf?src-supplier=Jameco, ComponentLink2Description=https://datasheet.ciiva.com/15083/lm7805c-15083790.pdf?src-supplier=Digi-Key, ComponentLink2URL=https://datasheet.ciiva.com/15083/lm7805c-15083790.pdf?src-supplier=Digi-Key, ComponentLink3Description=https://datasheet.ciiva.com/14280/lm340-n-14280911.pdf?src-supplier=Avnet, ComponentLink3URL=https://datasheet.ciiva.com/14280/lm340-n-14280911.pdf?src-supplier=Avnet, Height=8.89mm, Lead Free="Contains Lead", Length=10.16mm, Manufacturer Part Number=LM7805CT/NOPB, Mount="Through Hole", Number of Outputs=1, Number of Pins=3, Number of Regulators=1, Output Current=1A, Output Type=Fixed, Output Voltage=5V, Packaging=Rail/Tube, Polarity=Positive, Pricing 1="1=1,63000, 10=1,46300, 25=1,38080, 100=1,17630, 250=1,10452, 500=0,96646, 1000=0,87007 (USD)", Radiation Hardening=No, RoHS=Yes, RoHS Compliant=Yes, Series=-, Stock 1=13155, Supplier 1=Digi-Key, Width=4.7mm
HL1 HL3: library part 151051RS11000, "WURTH ELEKTRONIK - 151051RS11000 - LED, Red, Through Hole, T-1 3/4 (5mm), 30 mA, 2.1 V, 630 nm", Case/Package=Radial, Color=Red, Forward Current=30mA, Forward Voltage=2.1V, Manufacturer="Wurth Electronics", Max Operating Temperature=85°C, Min Operating Temperature=-40°C, Package Quantity=1, Supplier Part Number 1=732-5016-ND, Test Current=20mA, Category=LEDs, ComponentLink1Description=https://datasheet.ciiva.com/23843/151051rs11000-23843281.pdf?src-supplier=Newark, ComponentLink1URL=https://datasheet.ciiva.com/23843/151051rs11000-23843281.pdf?src-supplier=Newark, ComponentLink2Description=https://datasheet.ciiva.com/29335/759488-da-01-en-tht-led-5mm-rot-151051rs11000-29335455.pdf?src-supplier=Conrad, ComponentLink2URL=https://datasheet.ciiva.com/29335/759488-da-01-en-tht-led-5mm-rot-151051rs11000-29335455.pdf?src-supplier=Conrad, ComponentLink3Description=https://datasheet.ciiva.com/22657/1911506-22657034.pdf?src-supplier=Element14, ComponentLink3URL=https://datasheet.ciiva.com/22657/1911506-22657034.pdf?src-supplier=Element14, ComponentLink4Description=https://datasheet.ciiva.com/29562/151051rs11000-29562906.pdf?src-supplier=Digi-Key, ComponentLink4URL=https://datasheet.ciiva.com/29562/151051rs11000-29562906.pdf?src-supplier=Digi-Key, Dominant Wavelength=645nm, Height=8.9mm, Lens Size=5mm, Lens Style=Diffused,Round,Circular, Luminous Intensity=30mcd, Manufacturer Part Number=151051RS11000, Mount="Through Hole", Pricing 1="1=0,16000, 50=0,14500, 100=0,12500, 500=0,12000 (USD)", REACH SVHC=Unknown, RoHS=Yes, RoHS Compliant=Yes, Stock 1=6443, Supplier 1=Digi-Key, Viewing Angle=60°, Wavelength=630nm
HL2: library part 151051BS04000, "WURTH ELEKTRONIK - 151051BS04000 - LED, 5MM, BLUE, 500MCD, 470NM", Case/Package=Radial, Color=Blue, Forward Current=30mA, Forward Voltage=3.2V, Manufacturer="Wurth Electronics", Max Operating Temperature=85°C, Min Operating Temperature=-40°C, Package Quantity=1, Supplier Part Number 1=732-5015-ND, Test Current=20mA, Category=LEDs, ComponentLink1Description=https://datasheet.ciiva.com/23843/151051bs04000-23843280.pdf?src-supplier=Newark, ComponentLink1URL=https://datasheet.ciiva.com/23843/151051bs04000-23843280.pdf?src-supplier=Newark, ComponentLink2Description=https://datasheet.ciiva.com/29363/759492-da-01-en-tht-led-5mm-blau-151051bs04000-29363825.pdf?src-supplier=Conrad, ComponentLink2URL=https://datasheet.ciiva.com/29363/759492-da-01-en-tht-led-5mm-blau-151051bs04000-29363825.pdf?src-supplier=Conrad, ComponentLink3Description=https://datasheet.ciiva.com/29562/151051bs04000-29562902.pdf?src-supplier=Digi-Key, ComponentLink3URL=https://datasheet.ciiva.com/29562/151051bs04000-29562902.pdf?src-supplier=Digi-Key, Dominant Wavelength=470nm, Height=8.9mm, Lens Size=5mm, Lens Style=Diffused,Circular,Round, Luminous Intensity=500mcd, Manufacturer Part Number=151051BS04000, Mount="Through Hole", Packaging=Bulk, Pricing 1="1=0,25000, 50=0,23000, 100=0,19800, 500=0,18600 (USD)", REACH SVHC=Unknown, RoHS=Yes, RoHS Compliant=Yes, Stock 1=14295, Supplier 1=Digi-Key, Viewing Angle=40°, Wavelength=470nm
HL4 HL6: library part 151051VS04000, "WURTH ELEKTRONIK - 151051VS04000 - LED, Green, Through Hole, T-1 3/4 (5mm), 30 mA, 2.1 V, 572 nm", Case/Package=Radial, Color=Green, Forward Current=30mA, Forward Voltage=2.1V, Manufacturer="Wurth Electronics", Max Operating Temperature=85°C, Min Operating Temperature=-40°C, Package Quantity=1, Supplier Part Number 1=732-5017-ND, Test Current=20mA, Category=LEDs, ComponentLink1Description=https://datasheet.ciiva.com/23843/151051vs04000-23843282.pdf?src-supplier=Newark, ComponentLink1URL=https://datasheet.ciiva.com/23843/151051vs04000-23843282.pdf?src-supplier=Newark, ComponentLink2Description=https://datasheet.ciiva.com/29363/759491-da-01-en-tht-led-5mm-b-gruen-151051vs04000-29363828.pdf?src-supplier=Conrad, ComponentLink2URL=https://datasheet.ciiva.com/29363/759491-da-01-en-tht-led-5mm-b-gruen-151051vs04000-29363828.pdf?src-supplier=Conrad, ComponentLink3Description=https://datasheet.ciiva.com/29562/151051vs04000-29562903.pdf?src-supplier=Digi-Key, ComponentLink3URL=https://datasheet.ciiva.com/29562/151051vs04000-29562903.pdf?src-supplier=Digi-Key, ComponentLink4Description=https://datasheet.ciiva.com/48429/151051vs04000-eng-tds-48429978.pdf?src-supplier=Distrelec, ComponentLink4URL=https://datasheet.ciiva.com/48429/151051vs04000-eng-tds-48429978.pdf?src-supplier=Distrelec, Dominant Wavelength=572nm, Height=8.9mm, Lens Size=5mm, Lens Style=Diffused,Circular,Round, Luminous Intensity=140mcd, Manufacturer Part Number=151051VS04000, Mount="Through Hole", Pricing 1="1=0,25000, 50=0,23000, 100=0,19800, 500=0,18600 (USD)", REACH SVHC=Unknown, RoHS=Yes, RoHS Compliant=Yes, Stock 1=5536, Supplier 1=Digi-Key, Viewing Angle=40°, Wavelength=572nm
HL5: library part 151051YS04000, "WURTH ELEKTRONIK - 151051YS04000 - LED, Yellow, Through Hole, T-1 3/4 (5mm), 30 mA, 2 V, 590 nm", Case/Package=Radial, Color=Yellow, Forward Current=30mA, Forward Voltage=2V, Manufacturer="Wurth Electronics", Max Operating Temperature=85°C, Min Operating Temperature=-40°C, Package Quantity=1, Supplier Part Number 1=732-5018-ND, Test Current=20mA, Category=LEDs, ComponentLink1Description=https://datasheet.ciiva.com/29562/151051ys04000-29562897.pdf?src-supplier=Digi-Key, ComponentLink1URL=https://datasheet.ciiva.com/29562/151051ys04000-29562897.pdf?src-supplier=Digi-Key, ComponentLink2Description=https://datasheet.ciiva.com/29335/759489-da-01-en-tht-led-5mm-gelb-151051ys04000-29335459.pdf?src-supplier=Conrad, ComponentLink2URL=https://datasheet.ciiva.com/29335/759489-da-01-en-tht-led-5mm-gelb-151051ys04000-29335459.pdf?src-supplier=Conrad, ComponentLink3Description=https://datasheet.ciiva.com/48429/151051ys04000-eng-tds-48429979.pdf?src-supplier=Distrelec, ComponentLink3URL=https://datasheet.ciiva.com/48429/151051ys04000-eng-tds-48429979.pdf?src-supplier=Distrelec, Dominant Wavelength=590nm, Height=8.9mm, Lens Size=5mm, Lens Style=Diffused,Round,Circular, Luminous Intensity=450mcd, Manufacturer Part Number=151051YS04000, Mount="Through Hole", Pricing 1="1=0,21000, 50=0,19800, 100=0,17100, 500=0,16050 (USD)", REACH SVHC=Unknown, RoHS=Yes, RoHS Compliant=Yes, Stock 1=1858, Supplier 1=Digi-Key, Viewing Angle=40°, Wavelength=590nm
J1: library part ATMEGA8A-PU, "MCU 8-bit ATmega AVR RISC 8KB Flash 3.3V/5V 28-Pin PDIP", Case/Package=PDIP, Frequency=16MHz, Manufacturer="Microchip / Atmel", Max Operating Temperature=85°C, Max Supply Voltage=5.5V, Min Operating Temperature=-40°C, Min Supply Voltage=2.7V, Package Quantity=14, Supplier Part Number 1=ATMEGA8A-PU-ND, Category=Microcontrollers, ComponentLink1Description=https://datasheet.ciiva.com/15213/getdatasheetpartid-316011-15213203.pdf?src-supplier=Verical, ComponentLink1URL=https://datasheet.ciiva.com/15213/getdatasheetpartid-316011-15213203.pdf?src-supplier=Verical, ComponentLink2Description=https://datasheet.ciiva.com/26818/atmega8a-pu-26818556.pdf?src-supplier=IIIC, ComponentLink2URL=https://datasheet.ciiva.com/26818/atmega8a-pu-26818556.pdf?src-supplier=IIIC, ComponentLink3Description=https://datasheet.ciiva.com/24154/atmel-8159-8-bit-avr-microcontroller-atmega8a-summary-24154172.pdf?src-supplier=Future+Electronics, ComponentLink3URL=https://datasheet.ciiva.com/24154/atmel-8159-8-bit-avr-microcontroller-atmega8a-summary-24154172.pdf?src-supplier=Future+Electronics, ComponentLink4Description=https://datasheet.ciiva.com/6658/8159s-6658029.pdf?src-supplier=Digi-Key, ComponentLink4URL=https://datasheet.ciiva.com/6658/8159s-6658029.pdf?src-supplier=Digi-Key, Contact Plating=Tin,Matte, Core Architecture=AVR, Data Bus Width=8b, Height=4.572mm, Interface=SPI,USART,I2C,UART, Lead Free="Lead Free", Length=34.8mm, Manufacturer Part Number=ATMEGA8A-PU, Max Frequency=16MHz, Memory Size=8KB, Memory Type=FLASH, Mount="Through Hole", Number of ADC Channels=6, Number of I2C Channels=1, Number of I/Os=23, Number of Pins=28, Number of Programmable I/O=23, Number of PWM Channels=3, Number of SPI Channels=1, Number of Timers/Counters=3, Oscillator Type=Internal, Packaging=Rail/Tube, Peripherals="Brown-out Detect/Reset,POR,PWM,WDT", Pricing 1="1=2,66000, 25=2,43120, 100=2,20000 (USD)", Radiation Hardening=No, RAM Size=1KB, REACH SVHC="No SVHC", RoHS=Yes, RoHS Compliant=Yes, Series="AVR® ATmega", Stock 1=7653, Supplier 1=Digi-Key, Watchdog Timer=Yes, Width=7.49mm
R1 R11: library part CRCW080510K0JNEAC, "Res Thick Film 0805 10K Ohm 5% 1/8W ±200ppm/°C Molded SMD Paper T/R", Case/Package=SMD/SMT, Manufacturer="Vishay Semiconductors", Max Operating Temperature=155°C, Min Operating Temperature=-55°C, Power Rating=125mW, Resistor Type="Thick Film", Supplier Part Number 1=541-4163-1-ND, Temperature Coefficient=200ppm/°C, Tolerance=5%, Category=Resistors, ComponentLink1Description=http://www.vishay.com/docs/20035/dcrcwe3.pdf?src-supplier=Avnet+Asia, ComponentLink1URL=http://www.vishay.com/docs/20035/dcrcwe3.pdf?src-supplier=Avnet+Asia, ComponentLink2Description=http://www.vishay.com/docs/28773/crcwce3.pdf?src-supplier=Digi-Key, ComponentLink2URL=http://www.vishay.com/docs/28773/crcwce3.pdf?src-supplier=Digi-Key, Contact Plating=Tin, Lead Free="Lead Free", Length=2mm, Manufacturer Part Number=CRCW080510K0JNEAC, Mount="Surface Mount", Pricing 1="1=0,10000, 10=0,04000, 100=0,01630, 1000=0,00731, 2500=0,00635 (USD)", Resistance=10kR, RoHS=Yes, RoHS Compliant=Yes, Stock 1=146, Supplier 1=Digi-Key, Termination=Wraparound
R2 R3 R13 R14 R15 R16 R17 R18: library part CRCW08051K00JNEA, "Res Thick Film 0805 1K Ohm 5% 1/8W 200ppm/C Molded SMD SMD Paper T/R", Case Code (Imperial)=0805, Case Code (Metric)=2012, Manufacturer="Vishay Dale", Max Operating Temperature=155°C, Max Power Dissipation=125mW, Min Operating Temperature=-55°C, Package Quantity=1, Resistance Tolerance=5%, Resistor Type="Thick Film", Supplier Part Number 1=541-1.0KACT-ND, Temperature Coefficient=200ppm/°C, Voltage Rating=150V, Case/Package=0805, Category="Chip SMD Resistors", ComponentLink1Description=https://datasheet.ciiva.com/8337/dcrcwe3-8337669.pdf?src-supplier=Avnet, ComponentLink1URL=https://datasheet.ciiva.com/8337/dcrcwe3-8337669.pdf?src-supplier=Avnet, ComponentLink2Description=https://datasheet.ciiva.com/5544/dcrcwe3-109170-5544649.pdf?src-supplier=Mouser, ComponentLink2URL=https://datasheet.ciiva.com/5544/dcrcwe3-109170-5544649.pdf?src-supplier=Mouser, ComponentLink3Description=https://datasheet.ciiva.com/2463/dcrcwe3-2463178.pdf?src-supplier=Digi-Key, ComponentLink3URL=https://datasheet.ciiva.com/2463/dcrcwe3-2463178.pdf?src-supplier=Digi-Key, ComponentLink4Description=https://datasheet.ciiva.com/2463/dcrcwe3-2463179.pdf?src-supplier=Digi-Key, ComponentLink4URL=https://datasheet.ciiva.com/2463/dcrcwe3-2463179.pdf?src-supplier=Digi-Key, ComponentLink5Description=https://datasheet.ciiva.com/46441/1533075-46441628.pdf?src-supplier=Element14, ComponentLink5URL=https://datasheet.ciiva.com/46441/1533075-46441628.pdf?src-supplier=Element14, ComponentLink6Description=https://datasheet.ciiva.com/3258/dcrcwe3-3258221.pdf?src-supplier=Avnet, ComponentLink6URL=https://datasheet.ciiva.com/3258/dcrcwe3-3258221.pdf?src-supplier=Avnet, ComponentLink7Description=https://datasheet.ciiva.com/16755/70201119-16755757.pdf?src-supplier=Allied+Electronics, ComponentLink7URL=https://datasheet.ciiva.com/16755/70201119-16755757.pdf?src-supplier=Allied+Electronics, ComponentLink8Description=https://datasheet.ciiva.com/16435/dcrcwe3-16435934.pdf?src-supplier=Future+Electronics, ComponentLink8URL=https://datasheet.ciiva.com/16435/dcrcwe3-16435934.pdf?src-supplier=Future+Electronics, ComponentLink9Description=https://datasheet.ciiva.com/17204/dcrcwe3-17204398.pdf?src-supplier=Avnet+Europe, ComponentLink9URL=https://datasheet.ciiva.com/17204/dcrcwe3-17204398.pdf?src-supplier=Avnet+Europe, Construction=Rectangular, Contact Plating=Tin, Depth=1.25mm, Features="Automotive AEC-Q200", Height=0.02inch, Lead Free="Lead Free", Length=2mm, Manufacturer Part Number=CRCW08051K00JNEA, Military Standard=Not, Mount="Surface Mount", Number of Pins=2, Number of Terminations=2, Packaging="Tape and Reel", Power Rating=125mW, Pricing 1="1=0,10000, 10=0,04200, 100=0,01700, 1000=0,00762, 2500=0,00661 (USD)", Radiation Hardening=No, REACH SVHC=Unknown, Resistance=1kR, RoHS=Yes, RoHS Compliant=Yes, Series=CRCW, Size Code=0805, Stock 1=2818, Supplier 1=Digi-Key, Termination=SMD/SMT, Tolerance=5%, Voltage Rating (DC)=150V, Weight=0.000194oz, Width=1.25mm
R4: library part CRCW0805100KJNEB, "Res Thick Film 0805 100K Ohm 5% 1/8W 200ppm/C Molded SMD SMD Paper T/R", Case Code (Imperial)=0805, Case Code (Metric)=2012, Manufacturer="Vishay Dale", Max Operating Temperature=155°C, Max Power Dissipation=125mW, Min Operating Temperature=-55°C, Package Quantity=10000, Resistance Tolerance=5%, Resistor Type="Thick Film", Supplier Part Number 1=541-CRCW0805100KJNEBCT-ND, Temperature Coefficient=200ppm/°C, Voltage Rating=150V, Case/Package=0805, Category="Chip SMD Resistors", ComponentLink1Description=https://datasheet.ciiva.com/5543/dcrcwe3-109170-5543783.pdf?src-supplier=Mouser, ComponentLink1URL=https://datasheet.ciiva.com/5543/dcrcwe3-109170-5543783.pdf?src-supplier=Mouser, ComponentLink2Description=https://datasheet.ciiva.com/8982/dcrcwe3-8982399.pdf?src-supplier=Avnet, ComponentLink2URL=https://datasheet.ciiva.com/8982/dcrcwe3-8982399.pdf?src-supplier=Avnet, Contact Plating=Tin, Features="Automotive AEC-Q200", Height=0.02inch, Lead Free="Lead Free", Length=0.079inch, Manufacturer Part Number=CRCW0805100KJNEB, Number of Pins=2, Number of Terminations=2, Packaging="Tape and Reel", Power Rating=125mW, Pricing 1="1=0,10000, 10=0,04200, 100=0,01700, 1000=0,00762, 2500=0,00661, 5000=0,00546 (USD)", Radiation Hardening=No, REACH SVHC=Unknown, Resistance=100kR, RoHS=Yes, RoHS Compliant=Yes, Series=CRCW, Stock 1=14812, Supplier 1=Digi-Key, Tolerance=5%, Voltage Rating (DC)=150V, Weight=0.000194oz, Width=0.049inch
R5: library part 3313J-1-103E, "BOURNS 3313J-1-103E             TRIMMER, 10KOHM, 125mW, SMD", Color=Natural, Insulation Resistance=100MR, Manufacturer=Bourns, Max Operating Temperature=125°C, Max Power Dissipation=125mW, Min Operating Temperature=-55°C, Package Quantity=1000, Resistance Tolerance=20%, Resistor Type=Cermet, Supplier Part Number 1=3313J-103ECT-ND, Temperature Coefficient=100ppm/°C, Voltage Rating (DC)=500V, Category="Variable Resistors and Potentiometers", ComponentLink1Description=https://datasheet.ciiva.com/6197/1719390-6197392.pdf?src-supplier=Farnell, ComponentLink1URL=https://datasheet.ciiva.com/6197/1719390-6197392.pdf?src-supplier=Farnell, ComponentLink2Description=https://datasheet.ciiva.com/11831/0900766b80dbb89c-11831555.pdf?src-supplier=RSComponents, ComponentLink2URL=https://datasheet.ciiva.com/11831/0900766b80dbb89c-11831555.pdf?src-supplier=RSComponents, ComponentLink3Description=https://datasheet.ciiva.com/2156/3313-2156354.pdf?src-supplier=Digi-Key, ComponentLink3URL=https://datasheet.ciiva.com/2156/3313-2156354.pdf?src-supplier=Digi-Key, ComponentLink4Description=https://datasheet.ciiva.com/2156/3313-2156355.pdf?src-supplier=Digi-Key, ComponentLink4URL=https://datasheet.ciiva.com/2156/3313-2156355.pdf?src-supplier=Digi-Key, ComponentLink5Description=https://datasheet.ciiva.com/2156/3313-2156356.pdf?src-supplier=Digi-Key, ComponentLink5URL=https://datasheet.ciiva.com/2156/3313-2156356.pdf?src-supplier=Digi-Key, ComponentLink6Description=https://datasheet.ciiva.com/43573/1157501-43573718.pdf?src-supplier=Jameco, ComponentLink6URL=https://datasheet.ciiva.com/43573/1157501-43573718.pdf?src-supplier=Jameco, ComponentLink7Description=https://datasheet.ciiva.com/28659/1770668-28659191.pdf?src-supplier=Element14, ComponentLink7URL=https://datasheet.ciiva.com/28659/1770668-28659191.pdf?src-supplier=Element14, ComponentLink8Description=https://datasheet.ciiva.com/16812/3313-16812088.pdf?src-supplier=Avnet+Europe, ComponentLink8URL=https://datasheet.ciiva.com/16812/3313-16812088.pdf?src-supplier=Avnet+Europe, ComponentLink9Description=https://datasheet.ciiva.com/7953/1864507-7953225.pdf?src-supplier=Element14, ComponentLink9URL=https://datasheet.ciiva.com/7953/1864507-7953225.pdf?src-supplier=Element14, ComponentLink10Description=https://datasheet.ciiva.com/16715/70153423-16715693.pdf?src-supplier=Allied+Electronics, ComponentLink10URL=https://datasheet.ciiva.com/16715/70153423-16715693.pdf?src-supplier=Allied+Electronics, Depth=3.5mm, Height=2.2mm, Lead Free="Lead Free", Length=3.2mm, Manufacturer Part Number=3313J-1-103E, Military Standard=Not, Mount="Surface Mount", Number of Turns=1, Packaging="Tape and Reel", Power Rating=125mW, Pricing 1="1=1,82000, 10=1,59500, 25=1,43000, 50=1,37500, 100=1,32000, 250=1,26500, 500=1,04500 (USD)", Radiation Hardening=No, REACH SVHC="No SVHC", Resistance=10kR, RoHS=Yes, RoHS Compliant=Yes, Series="Trimpot® 3313 - Sealed", Stock 1=968, Supplier 1=Digi-Key, Taper=Linear, Technology=CERMET, Termination=J-Hook, Tolerance=20%, Type=Potentiometer, Weight=283mg, Width=0.126inch